# Altium PCB Node.PcbDoc
Units mm, origin at the board's own origin, x right, y up, seen from the top; angles counter-clockwise.
Board outline 73.91 x 69.22 mm, 2 copper layers (Top Layer, Bottom Layer); 11 components, 18 nets, 68 pads, 0 vias.
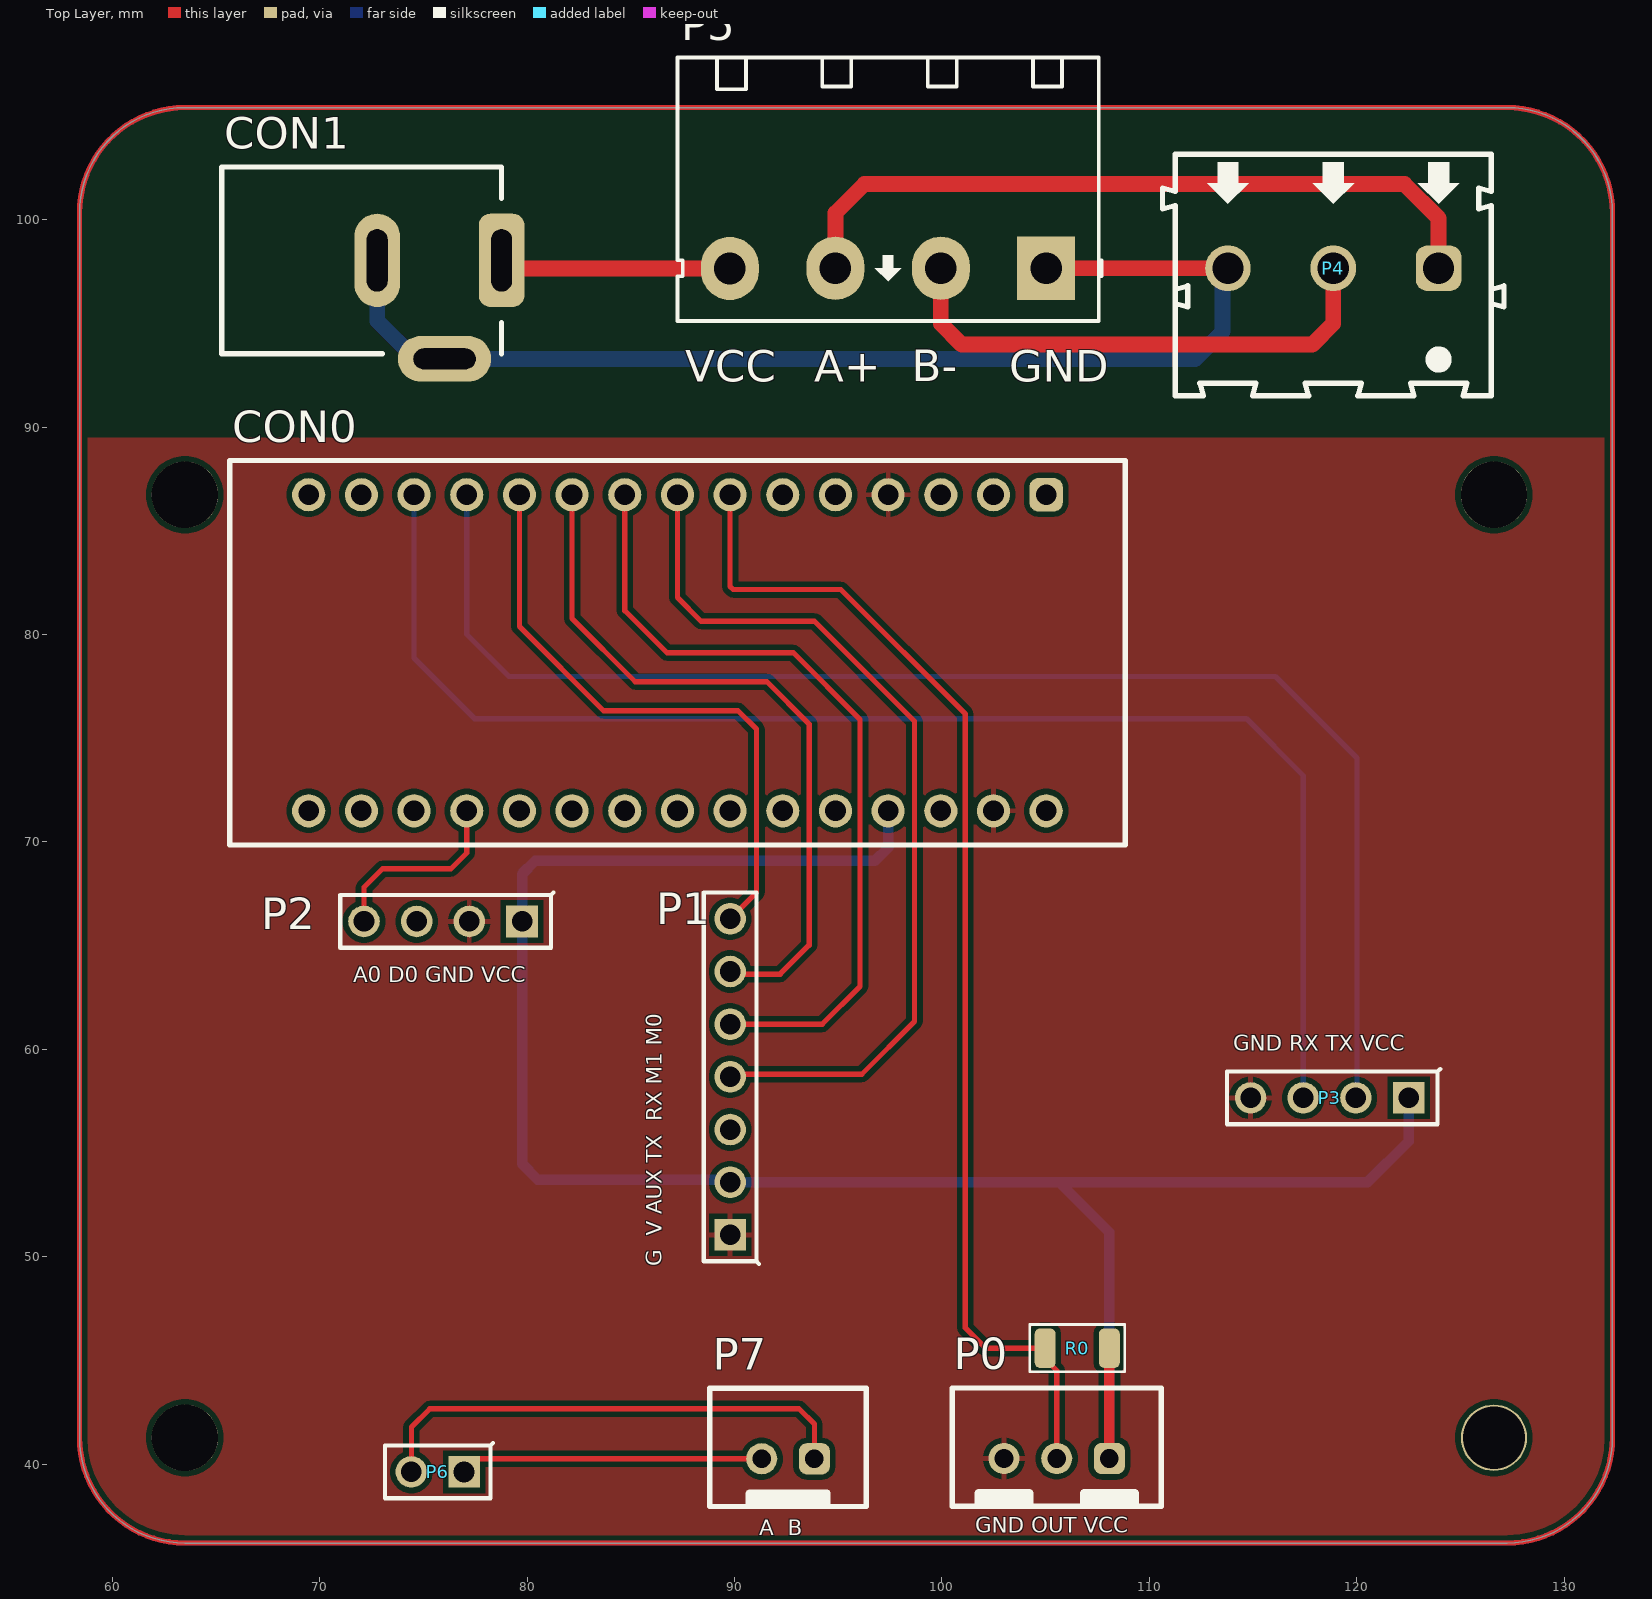
[diagram p0: Top Layer view]
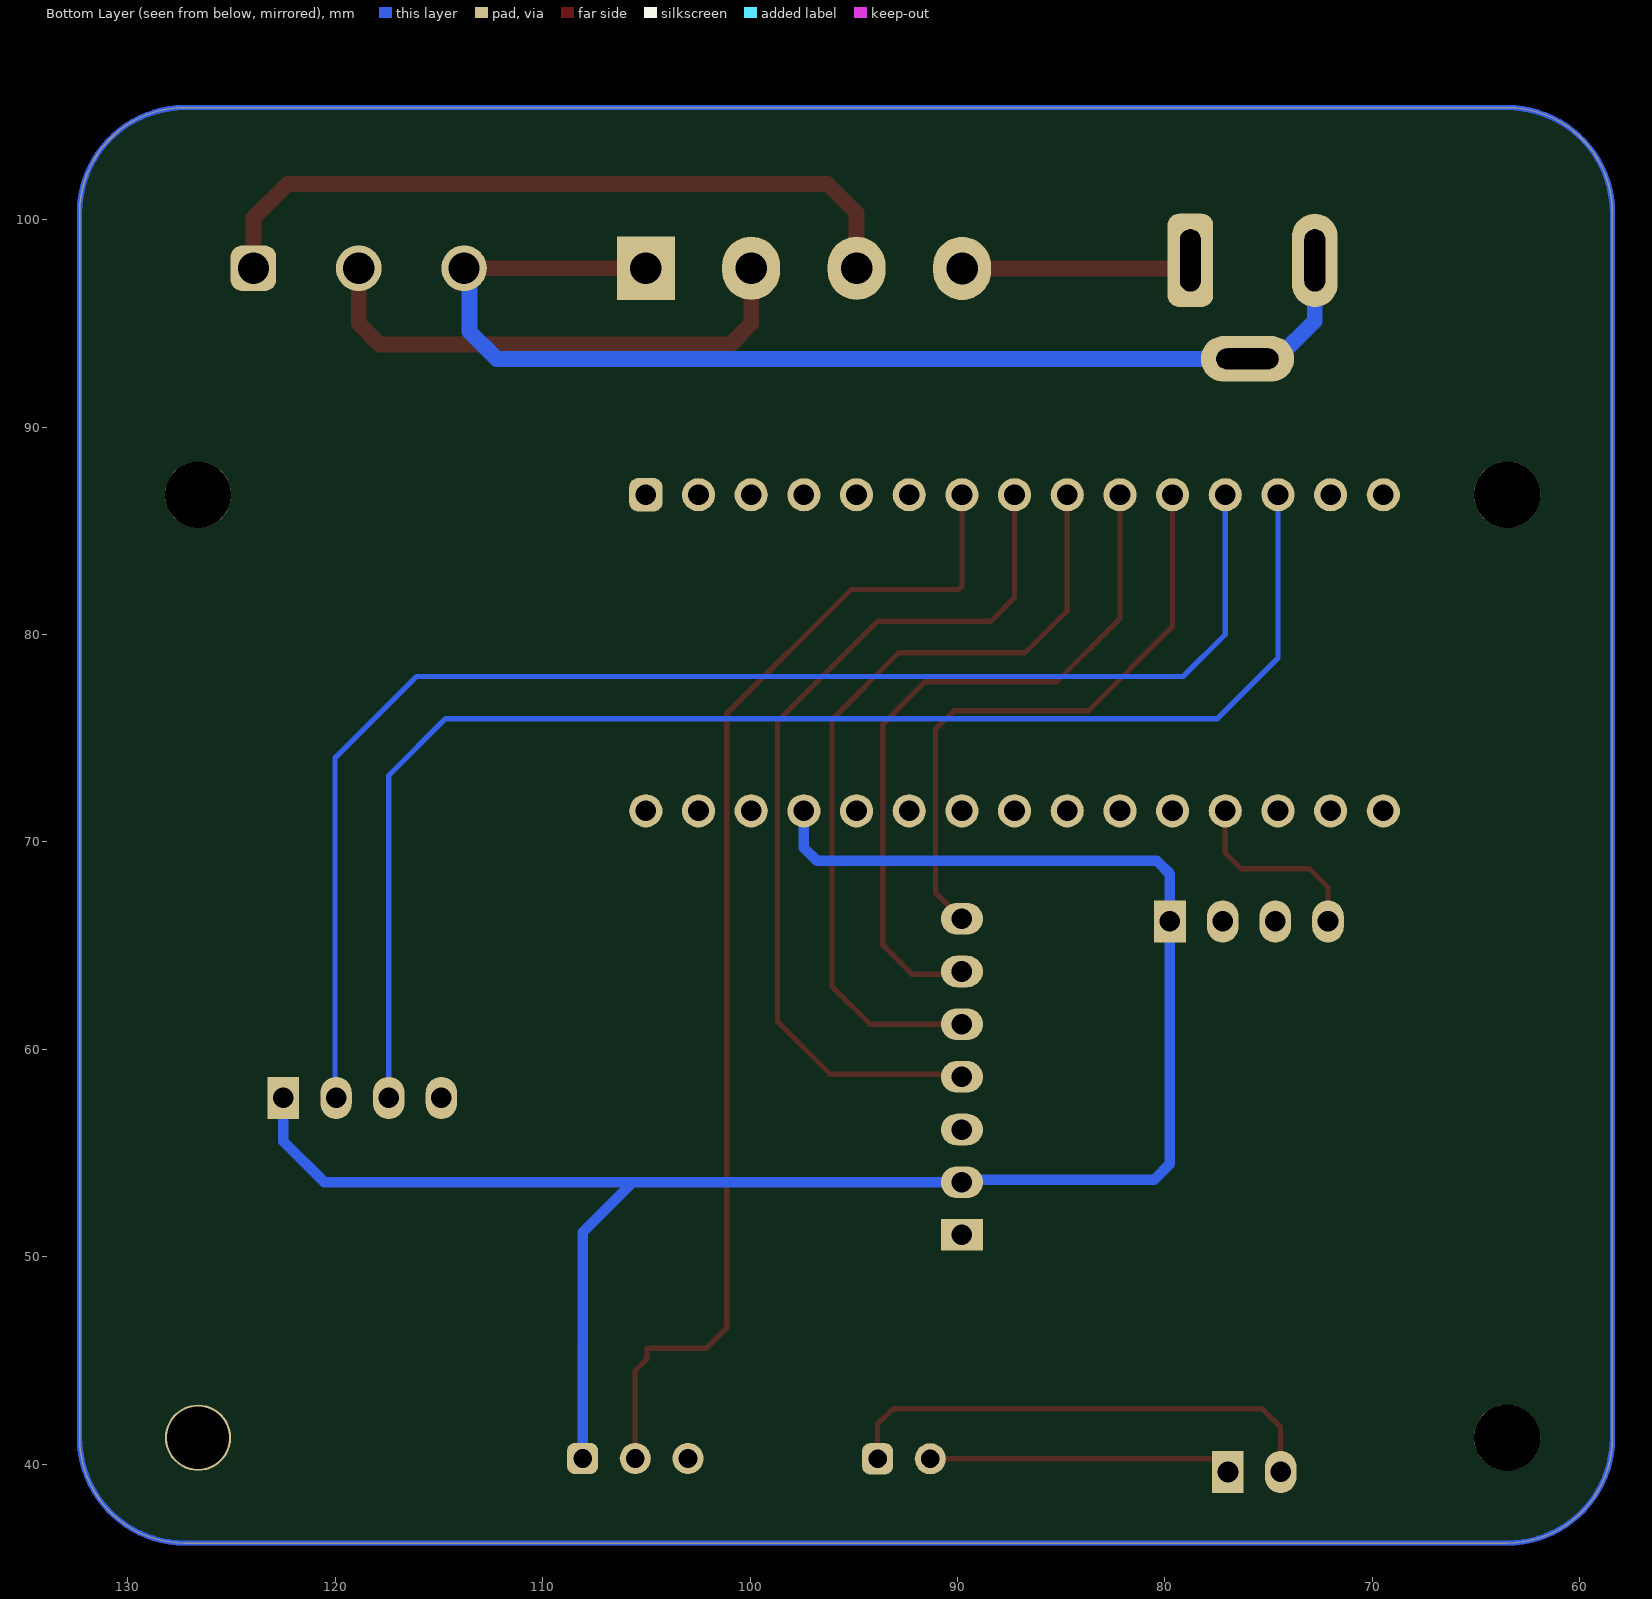
[diagram p1: Bottom Layer view, seen from below]

## Layer stack, top to bottom
Top Solder: solder mask 0.0102, Solder Resist, Dk 3.5
Top Layer: signal copper 0.0356
Dielectric 1: dielectric 0.32, FR-4, Dk 4.8
Bottom Layer: signal copper 0.0356
Bottom Solder: solder mask 0.0102, Solder Resist, Dk 3.5

## Board outline
58.42,41.275 ccw(c63.5,41.275) 63.5,36.195 127.254,36.195 ccw(c127.254,41.275) 132.334,41.275 132.334,100.33 ccw(c127.254,100.33) 127.254,105.41 63.5,105.41 ccw(c63.5,100.33) 58.42,100.33

## Design rules (kind name [scope] priority, off if disabled: settings)
Clearance [All] p1: gap=0.254 ignorepadtopadclearanceinfootprint=FALSE except(0: Arc-Hole Track-Hole SMDPad-Hole THPad-Hole Via-Hole Fill-Hole Poly-Hole Region-Hole Text-Hole)
PolygonConnect [All] p1: connectstyle=Relief reliefconductorwidth=0.254 reliefentries=4 polygonreliefangle="90 Angle" airgapwidth=0.254
RoutingVias [All] p1: holewidth=0.711 width=1.27 viastyle="Through Hole" minholewidth=0.711 minwidth=1.27 maxholewidth=0.711 maxwidth=1.27
SolderMaskExpansion [All] p1: expansion=0.102 istentingtop=FALSE
Width [All] p1: maxlimit=0.762 minlimit=0.254 preferedwidth=0.254 minimp=50.000000 maximp=50.000000 favimp=50.000000
30 further rules are at their usual default settings.

## Components (designator, comment, footprint, x,y, rotation, side; value= is the part's Value field where it differs from the comment)
CON0 "Arduino Nano" "Arduino Nano 15x2" 105.029,86.741 r270 top
CON1 "CON DC PWR" CONN/DC/PWR/5.0MM 78.771,98.044 r0 top
P0 "Header 3" XH2.54-3P 102.997,40.274 r180 top
P1 "Header 7" "Header 7" 89.789,51.054 r90 top
P2 "Header 4" "Header 4" 79.756,66.167 r180 top
P3 "Header 4" "Header 4" 122.504,57.658 r180 top
P4 "Header 3" SH152-5.08-3P 126.492,91.513 r180 top
P5 "Header 4" "HDR DOMINO 4" 105.029,97.663 r180 top
P6 "Header 2" "Header 2" 76.962,39.624 r180 top
P7 "Header 2" XH2.54-2P 93.853,40.259 r180 top
R0 "R" "R 1206 (3216)" 106.527,45.593 r0 top

## Footprints (in the part's own frame and the unit in brackets; to place one, negate y for a bottom-side part, rotate by r counter-clockwise, add the part's x,y. Pads: shape width x height; smd on the part's side, far side on the other; paste and mask are expansions set on the pad)
"Arduino Nano 15x2" [mm]
  rrect50% 1.6x1.6 hole 1: 1(0,0)
  round 1.6 hole 1: 2(0,-2.54) 3(0,-5.08) 4(0,-7.62) 5(0,-10.16) 6(0,-12.7) 7(0,-15.24) 8(0,-17.78) 9(0,-20.32) 10(0,-22.86) 11(0,-25.4) 12(0,-27.94) 13(0,-30.48) 14(0,-33.02) 15(0,-35.56) 16(15.24,-35.56) 17(15.24,-33.02) 18(15.24,-30.48) 19(15.24,-27.94) 20(15.24,-25.4) 21(15.24,-22.86) 22(15.24,-20.32) 23(15.24,-17.78) 24(15.24,-15.24) 25(15.24,-12.7) 26(15.24,-10.16) 27(15.24,-7.62) 28(15.24,-5.08) 29(15.24,-2.54) 30(15.24,0)
  silkscreen extent -1.65,-39.37 16.89,3.81
CONN/DC/PWR/5.0MM [mm]
  rrect50% 2.2x4.5 hole 1 slot 3 at 90 deg: 1(0,0)
  oval 2.2x4.5 hole 1 slot 3 at 90 deg: 2(-6,0)
  oval 4.5x2.2 hole 1 slot 3 at 0 deg: 3(-2.75,-4.75)
  silkscreen extent -13.5,-4.5 0,4.5, body extent -13.58,-5 0.25,4.5, height 11.02
"HDR DOMINO 4" [mil] "Header 4, 4 pin, hight 300mil, Pin to Pin 200, Colour Green"
  rect 110x120 hole 60: 1(0,0)
  oval 110x120 hole 60: 2(200,0) 3(400.06,0.06) 4(600.39,0.39)
  silkscreen extent -105,-400 700,100, body extent -90,-402 692,70, height 334
"Header 2" [mil]
  rect 60x60 / inner rect 55x55 / far side rect 60x80 hole 39.37: 1(0,0)
  round 60 / inner round 55 / far side oval 60x80 hole 39: 2(100,0)
  silkscreen extent -55,-55 150,50, body extent -50,-50 150,50, height 350
"Header 4" [mil]
  rect 60x60 / inner round 60 / far side rect 60x80 hole 39: 1(0,0)
  round 60 / inner round 60 / far side oval 60x80 hole 39: 2(100,0) 3(200,0) 4(300,0)
  silkscreen extent -60,-55 345,50, body extent -50,-50 350,50, height 350
"Header 7" [mil]
  rect 60x60 / inner round 60 / far side rect 60x80 hole 39: 1(0,0)
  round 60 / inner round 60 / far side oval 60x80 hole 39: 2(100,0) 3(200,0) 4(300,0) 5(400,0) 6(500,0) 7(600,0)
  silkscreen extent -55,-55 650,50, body extent -51,-47 649,51, height 336
"R 1206 (3216)" [mm] "Chip Resistor, 2-Leads, Body 3.1x1.6mm, IPC Medium Density"
  rrect50% 1x1.9 smd: 1(-1.55,0) 2(1.55,0)
  silkscreen extent -2.29,-1.14 2.29,1.14, body extent -1.6,-0.8 1.6,0.8, height 0.6
SH152-5.08-3P [mm] "300V-15A, AWC 24-14"
  rrect50% 2.2x2.2 hole 1.5 mask+0: 1(2.54,-6.15)
  round 2.2 hole 1.5 mask+0: 2(7.62,-6.15) 3(12.7,-6.15)
  silkscreen extent -0.61,-11.65 15.85,0, body extent -0.61,-11.65 15.85,0, height 18
XH2.54-2P [mm]
  rrect50% 1.5x1.5 hole 0.9: 1(0,0)
  round 1.5 hole 0.9: 2(2.54,0)
  silkscreen extent -2.5,-3.4 5.04,2.4, body extent -2.47,-3.4 5.03,2.4, height 7.25
XH2.54-3P [mm]
  rrect50% 1.5x1.5 hole 0.9: 1(-5.08,0)
  round 1.5 hole 0.9: 2(-2.54,0) 3(0,0)
  silkscreen extent -7.58,-3.4 2.5,2.4, body extent -7.42,-3.4 2.34,2.44, height 7.21

## Part data
CON0: "Arduino Nano 15X2"
CON1: "DC input connector"
P0 P4: "Header, 3-Pin"
P1: "Header, 7-Pin", LatestRevisionDate=17-Jul-2002, LatestRevisionNote="Re-released for DXP Platform.", Publisher="Altium Limited"
P2 P3 P5: "Header, 4-Pin"
P6 P7: "Header, 2-Pin", LatestRevisionDate=17-Jul-2002, LatestRevisionNote="Re-released for DXP Platform.", Publisher="Altium Limited"
R0: library part Resistor, "Resistor", LatestRevisionDate=17-Jul-2002, LatestRevisionNote="Re-released for DXP Platform.", PackageReference=AXIAL-0.3, Published=8-Jun-2000, Publisher="Altium Limited"

## Free pads (board coordinates)
  round 3.2 hole 3.2: 3(63.5,41.275) 3(63.5,86.741) 3(126.619,86.741)
  round 3.2 hole 3: 3(126.619,41.275)

## Nets (pads, with @x,y where several pads share a name; then routed paths per layer and width w, separated by ;. In a path a pad name is that pad's centre, name@x,y a point inside that pad or via, vN(x,y) a via of type N, cw(c..) or ccw(c..) an arc to the next point about the centre after c; other vN are vias at no path point)
DHT: CON0.7 P0.2 R0.1 | length 57.7
  Top Layer w0.254: CON0.7 89.789,82.318 89.938,82.169 95.123,82.169 101.13,76.162 101.13,46.571 102.108,45.593 R0.1 104.977,45.076 105.537,44.516 P0.2
GND: CON0.4 CON0.29 P0.3 P1.1 P2.2 P3.4
LORA_AUX: P1.3
LORA_M0: CON0.11 P1.7 | length 29.5
  Top Layer w0.254: CON0.11 79.629,80.391 83.693,76.327 90.17,76.327 91.059,75.438 91.059,67.564 P1.7
LORA_M1: CON0.10 P1.6 | length 34.6
  Top Layer w0.254: CON0.10 82.169,80.772 85.217,77.724 91.567,77.724 93.599,75.692 93.599,65.024 92.202,63.627 89.916,63.627 P1.6
LORA_RX: CON0.9 P1.5 | length 39
  Top Layer w0.254: CON0.9 84.709,81.153 86.741,79.121 92.837,79.121 96.05,75.908 96.05,63.03 94.234,61.214 P1.5
LORA_TX: CON0.8 P1.4 | length 43.3
  Top Layer w0.254: CON0.8 87.249,81.788 88.392,80.645 93.853,80.645 98.679,75.819 98.679,61.341 96.139,58.801 89.916,58.801 P1.4
LORA_VCC: CON0.27 P0.1 P1.2 P2.1 P3.1 R0.2 | length 99.6
  Top Layer w0.508: P0.1 R0.2
  Bottom Layer w0.508: CON0.27 97.409,69.723 96.774,69.088 80.391,69.088 79.756,68.453 P2.1 79.756,54.483 80.518,53.721 89.662,53.721 P1.2 105.664,53.594 ; P0.1 108.077,51.181 105.664,53.594 ; P3.1 122.504,55.575 120.523,53.594 105.664,53.594
NPK_RX: CON0.13 P3.3 | length 68.6
  Bottom Layer w0.254: CON0.13 74.549,78.867 77.47,75.946 114.681,75.946 117.424,73.203 P3.3
NPK_TX: CON0.12 P3.2 | length 68.5
  Bottom Layer w0.254: CON0.12 77.089,80.01 79.121,77.978 116.078,77.978 120.015,74.041 120.015,57.709 P3.2
RS485_A: P4.1 P5.3 | length 35.4
  Top Layer w0.762: P5.3 94.867,100.328 96.266,101.727 122.301,101.727 123.952,100.076 P4.1
RS485_B: P4.2 P5.2 | length 25.1
  Top Layer w0.762: P5.2 99.949,94.996 100.965,93.98 117.856,93.98 118.872,94.996 P4.2
RS485_GND: CON1.2 CON1.3 P4.3 P5.1 | length 56.9
  Top Layer w0.762: P5.1 P4.3
  Bottom Layer w0.762: CON1.2 72.771,95.123 74.6,93.294 CON1.3 112.217,93.294 113.538,94.615 113.538,97.409 P4.3
RS485_VCC: CON1.1 P5.4 | length 11.2
  Top Layer w0.254: CON1.1 CON1.1@79.162,97.653
  Top Layer w0.762: CON1.1@79.162,97.653 P5.4
SOIL_0: P6.1 P7.2 | length 14.6
  Top Layer w0.254: P6.1 77.597,40.259 P7.2
SOIL_1: P6.2 P7.1 | length 23.9
  Top Layer w0.254: P6.2 74.422,41.783 75.311,42.672 93.112,42.672 93.853,41.931 P7.1
SOIL_A0: CON0.19 P2.4 | length 9.3
  Top Layer w0.254: P2.4 72.136,67.818 73.025,68.707 76.327,68.707 77.089,69.469 CON0.19
SOIL_D0: P2.3
pads on no net: CON0.1 CON0.2 CON0.3 CON0.5 CON0.6 CON0.14 CON0.15 CON0.16 CON0.17 CON0.18 CON0.20 CON0.21 CON0.22 CON0.23 CON0.24 CON0.25 CON0.26 CON0.28 CON0.30

## Polygon pours and split planes (outlines as drawn)
GND on Top Layer "GND" (solid, remove dead copper, pour order 0): 54.864,89.408 54.938,89.482 152.206,89.482 152.206,45.907 139.446,33.147 46.355,33.147

## Other copper
Multi-Layer:
  the board outline again, w0.254

## Silkscreen, mask and mechanical layers (free items; w line width, h text height)
Top Overlay:
  text "B-" at 98.553,92.222 h1.52
  text "VCC" at 87.633,92.202 h1.52
  text "A+" at 93.855,92.202 h1.52
  text "GND" at 103.251,92.202 h1.52
  text "A0 D0 GND VCC" at 71.628,63.246 h0.76
  text "GND RX TX VCC" at 114.046,59.944 h0.76
  text "G  V AUX TX  RX M1 M0" at 86.487,49.53 h0.76 r90
  text "GND OUT VCC" at 101.6,36.703 h0.76
  text "A  B" at 91.186,36.576 h0.76